# Altium PCB stlink.PcbDoc
Units mm, origin at the board's own origin, x right, y up, seen from the top; angles counter-clockwise.
Board outline 31 x 15 mm, 2 copper layers (Top Layer, Bottom Layer), stack 1.571 mm thick; 18 components, 12 nets, 89 pads, 0 vias.
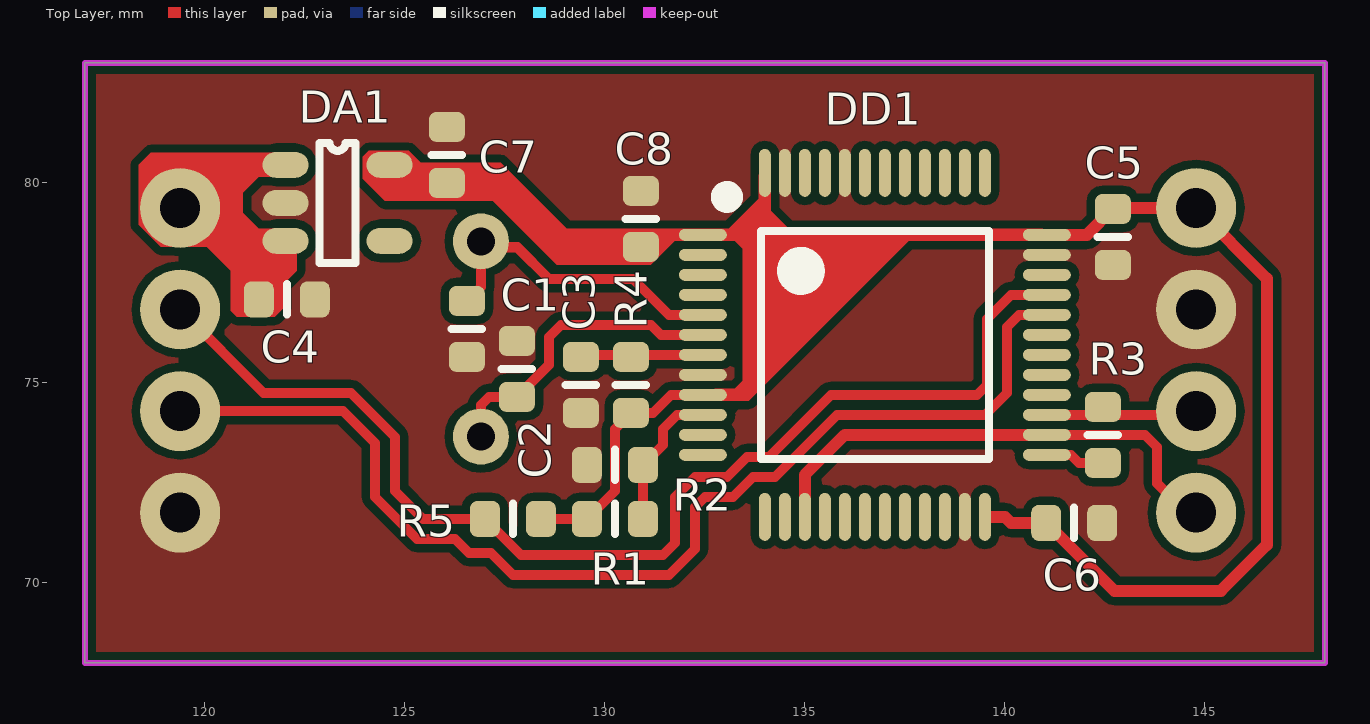
[diagram p0: Top Layer view]
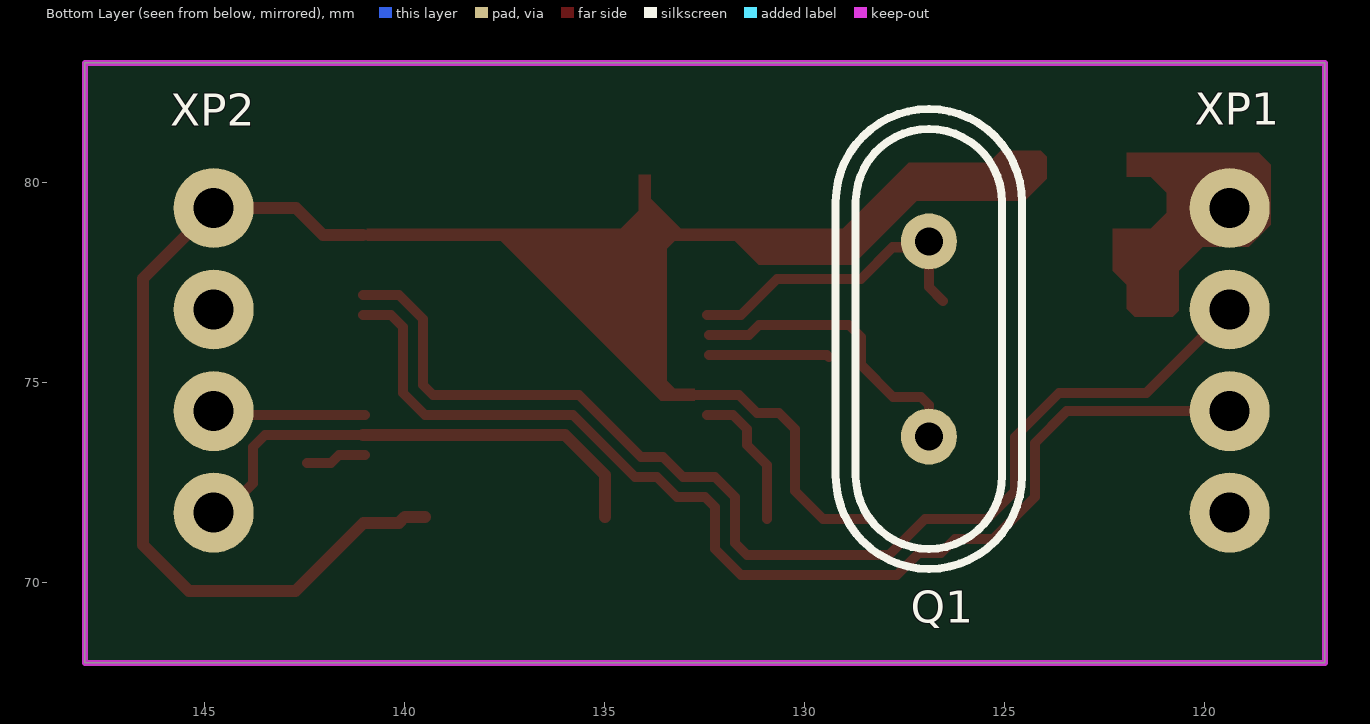
[diagram p1: Bottom Layer view, seen from below]
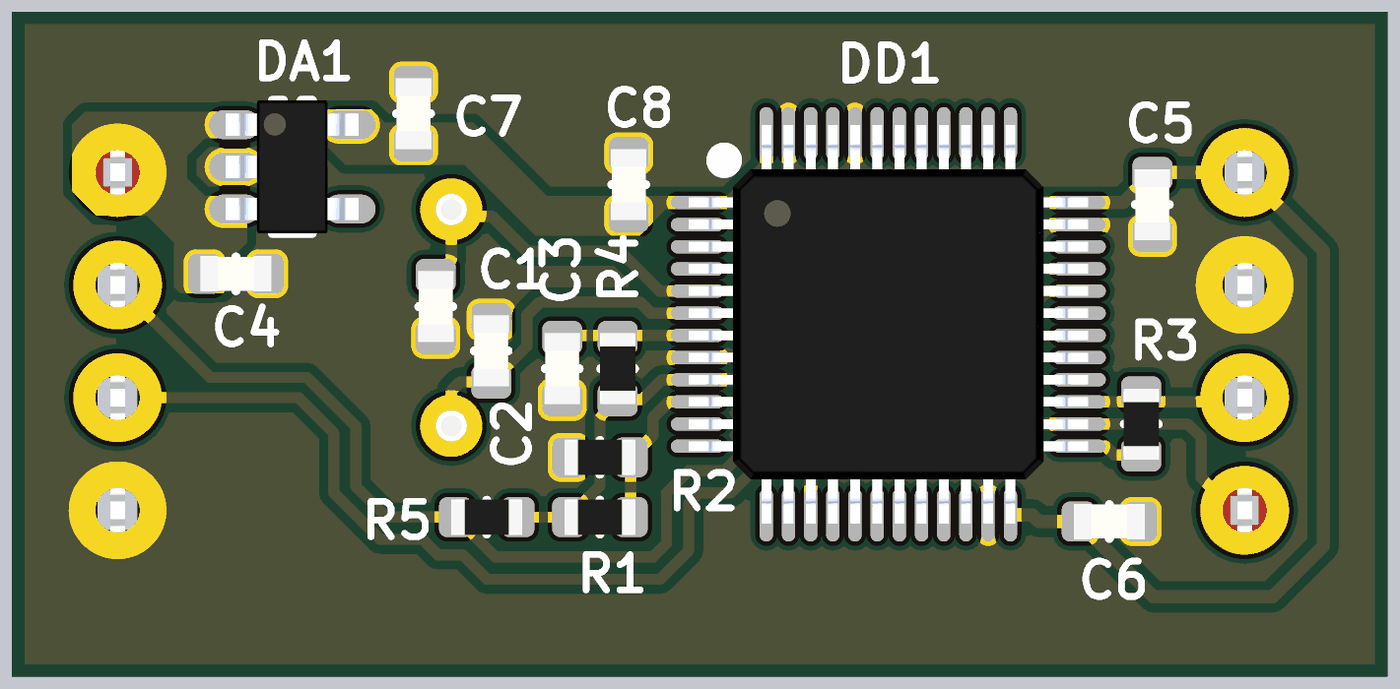
[diagram p2: 3D render of the assembled board from above, using the file's embedded part models]
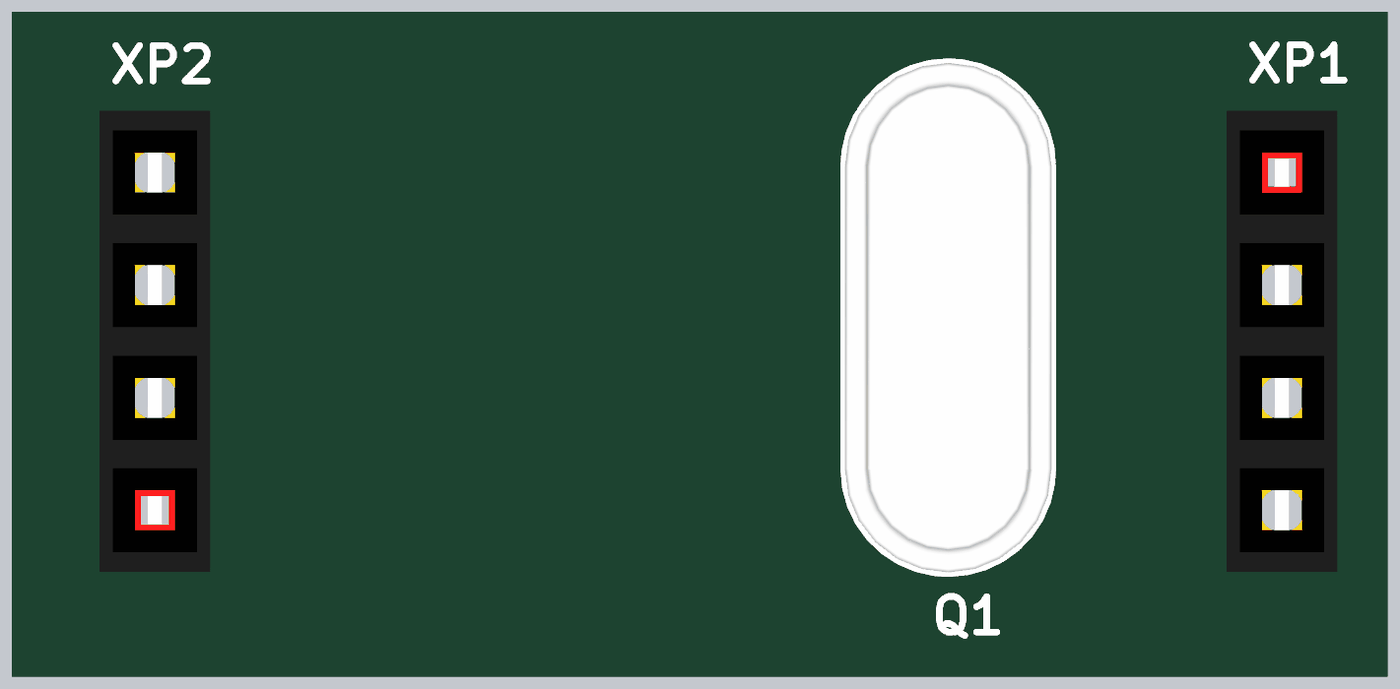
[diagram p3: 3D render of the assembled board from below, using the file's embedded part models]

## Layer stack, top to bottom
Top Solder: solder mask 0.0102, Solder Resist, Dk 3.5
Top Layer: signal copper 0.0356
Dielectric 1: dielectric 1.5, FR-4, Dk 4.8
Bottom Layer: signal copper 0.0356
Bottom Solder: solder mask 0.0102, Solder Resist, Dk 3.5

## Board outline
117,68 117,83 148,83 148,68

## Design rules (kind name [scope] priority, off if disabled: settings)
Clearance [All] p1: gap=0.2
PolygonConnect [All] p1: connectstyle=Direct reliefconductorwidth=0.254 reliefentries=4 polygonreliefangle="90 Angle" airgapwidth=0.254
RoutingVias [All] p1: holewidth=0.711 width=1.27 viastyle="Through Hole" minholewidth=0.711 minwidth=1.27 maxholewidth=0.711 maxwidth=1.27
SolderMaskExpansion [All] p1: expansion=0.102
Width [All] p1: maxlimit=2 minlimit=0.2 preferedwidth=0.25
29 further rules are at their usual default settings.

## Components (designator, comment, footprint, x,y, rotation, side; value= is the part's Value field where it differs from the comment)
C1 "22pF" CAP0603R 126.55,76.35 r90 top
C2 "22pF" CAP0603R 127.8,75.35 r270 top
C3 "100nF" CAP0603R 129.4,74.95 r90 top
C4 "1uF" CAP0603R 122.047,77.089 r180 top
C5 "1uF" CAP0603R 142.7,78.65 r90 top
C6 "1uF" CAP0603R 141.732,71.501 r180 top
C7 "1uF" CAP0603R 126.05,80.7 r270 top
C8 "1uF" CAP0603R 130.9,79.1 r270 top
DA1 "LDS3985M30R" SOT23-5 123.317,79.502 r0 top
DD1 "STM32F103CBT6" LQFP48 136.75,75.95 r0 top
Q1 "20MHz" XTAL_HC-49/U 126.9,76.1 r90 bottom
R1 "10k" RES0603R 130.25,71.6 r180 top
R2 "10k" RES0603R 130.25,72.95 r0 top
R3 "220" RES0603R 142.45,73.7 r90 top
R4 "10k" RES0603R 130.65,74.95 r270 top
R5 "10k" RES0603R 127.7,71.6 r0 top
XP1 "PBS" PBS-04 119.38,75.565 r90 bottom
XP2 "PBS" PBS-04 144.78,75.565 r270 bottom

## Footprints (in the part's own frame and the unit in brackets; to place one, negate y for a bottom-side part, rotate by r counter-clockwise, add the part's x,y. Pads: shape width x height; smd on the part's side, far side on the other; paste and mask are expansions set on the pad)
CAP0603R [mm] "capacitor 0603 reflow soldering"
  rrect50% 0.75x0.9 smd: 1(-0.7,0) 2(0.7,0)
  silkscreen extent 0,-0.38 0,0.38, body extent -0.8,-0.4 0.8,0.4, height 0.81
LQFP48 [mm] "Thin QFP, 48-Leads, Body 7x7mm, Pitch 0.5mm, IPC High Density"
  oval 1.2x0.3 smd mask+0.1: 1(-4.3,2.75) 2(-4.3,2.25) 3(-4.3,1.75) 4(-4.3,1.25) 5(-4.3,0.75) 6(-4.3,0.25) 7(-4.3,-0.25) 8(-4.3,-0.75) 9(-4.3,-1.25) 10(-4.3,-1.75) 11(-4.3,-2.25) 12(-4.3,-2.75) 25(4.3,-2.75) 26(4.3,-2.25) 27(4.3,-1.75) 28(4.3,-1.25) 29(4.3,-0.75) 30(4.3,-0.25) 31(4.3,0.25) 32(4.3,0.75) 33(4.3,1.25) 34(4.3,1.75) 35(4.3,2.25) 36(4.3,2.75)
  oval 0.3x1.2 smd mask+0.1: 13(-2.75,-4.3) 14(-2.25,-4.3) 15(-1.75,-4.3) 16(-1.25,-4.3) 17(-0.75,-4.3) 18(-0.25,-4.3) 19(0.25,-4.3) 20(0.75,-4.3) 21(1.25,-4.3) 22(1.75,-4.3) 23(2.25,-4.3) 24(2.75,-4.3) 37(2.75,4.3) 38(2.25,4.3) 39(1.75,4.3) 40(1.25,4.3) 41(0.75,4.3) 42(0.25,4.3) 43(-0.25,4.3) 44(-0.75,4.3) 45(-1.25,4.3) 46(-1.75,4.3) 47(-2.25,4.3) 48(-2.75,4.3)
  silkscreen extent -3.9,-2.85 2.85,3.9, body extent -4.5,-4.5 4.5,4.5, height 1.52
PBS-04 [mm]
  round 2 hole 1: 1(-3.81,0) 2(-1.27,0) 3(1.27,0) 4(3.81,0)
  body extent -5.21,-1.25 5.2,1.25, height 8.51
RES0603R [mm] "resistor 0603 reflow soldering"
  rrect50% 0.75x0.9 smd: 1(-0.7,0) 2(0.7,0)
  silkscreen extent 0,-0.38 0,0.38, body extent -0.8,-0.4 0.8,0.4, height 0.46
SOT23-5 [mm] "SOT23, 5-Leads, Body 2.9x1.6mm, Pitch 0.95mm, Lead Span 2.8mm, IPC High Density"
  oval 1.15x0.65 smd mask+0.1: 1(-1.3,0.95) 2(-1.3,0) 3(-1.3,-0.95) 4(1.3,-0.95) 5(1.3,0.95)
  silkscreen extent -0.45,-1.5 0.45,1.5, body extent -1.5,-1.5 1.5,1.5, height 1.3
XTAL_HC-49/U [mm] "HC-49/U Leaded Cristal, Body 11.05x4.8mm; Pitch 4.88mm"
  round 1.4 hole 0.7: 1(-2.44,0) 2(2.44,0)
  silkscreen extent -5.75,-2.33 5.75,2.33, body extent -5.75,-2.33 5.75,2.33, height 3.5

## Part data
C1 C2: library part CC0603_22PF_50V_5%_NP0, "SMD 0805 Capacitor"
C3: library part CC0603_100NF_100V_10%_X7R, "SMD 0805 Capacitor"
C4 C5 C6 C7 C8: library part CC0603_1UF_25V_10%_X7R, "SMD 0805 Capacitor"
Q1: library part XTAL_20MHZ_AEL_HC-49/U, "Quartz Crystal"
R1 R2 R4 R5: library part R0603_10K_0.1%_0.063W_10PPM
R3: library part R0603_220R_1%_0.1W_100PPM
XP1 XP2: library part PBS-04

## Nets (pads, with @x,y where several pads share a name; then routed paths per layer and width w, separated by ;. In a path a pad name is that pad's centre, name@x,y a point inside that pad or via, vN(x,y) a via of type N, cw(c..) or ccw(c..) an arc to the next point about the centre after c; other vN are vias at no path point)
GND: C1.1 C2.1 C3.1 C4.1 C5.1 C6.1 C7.1 C8.1 DA1.2 DD1.8 DD1.23 DD1.35 DD1.44 DD1.47 R2.1 XP1.1 XP2.2
J_SWCK: DD1.15 DD1.26 XP2.4 | length 12.2
  Top Layer w0.25: DD1.26 143.5,73.7 143.8,73.4 143.8,72.49 XP2.4@144.45,71.84
  Top Layer w0.3: DD1.15 135,72.7 136,73.7 DD1.26
J_SWIO: DD1.27 R3.2 XP2.3 | length 3.3
  Top Layer w0.254: DD1.27@141,74.2 XP2.3@144.27,74.2
NetC1_2: C1.2 DD1.5 Q1.2 | length 7.7
  Top Layer w0.254: C1.2 126.9,77.4 126.9,78.39 127.81,78.39 128.6,77.6 130.7,77.6 131.6,76.7 DD1.5
NetC2_2: C2.2 DD1.6 Q1.1 | length 7.8
  Top Layer w0.254: Q1.1@126.9,73.51 126.9,74.45 127.1,74.65 C2.2 128.6,75.45 128.6,76.15 128.9,76.45 131.15,76.45 131.4,76.2 DD1.6@132.4,76.2
NetDD1_25: DD1.25 R3.1 | length 1.5
  Top Layer w0.254: DD1.25@141,73.2 141.65,73.2 141.85,73 R3.1
NRST: C3.2 DD1.7 R4.1 | length 3
  Top Layer w0.254: C3.2 129.45,75.7 DD1.7@132.4,75.7
SENSE: DD1.10 R1.1 R2.2 | length 3.6
  Top Layer w0.254: R1.1 R2.2 131.45,73.45 131.45,73.85 131.8,74.2 DD1.10
USBDM: DD1.32 XP1.2 | length 28.4
  Top Layer w0.25: XP1.2 123.455,74.295 124.25,73.5 124.25,72.15 125.3,71.1 126.25,71.1 126.6,70.75 127.15,70.75 127.7,70.2 131.6,70.2 132.25,70.85 132.25,71.9 132.5,72.15 133.2,72.15 133.7,72.65 134.25,72.65 135.8,74.2 139.5,74.2 140.05,74.75 140.05,76.4 140.35,76.7 DD1.32
USBDP: DD1.33 R5.1 XP1.3 | length 29.8
  Top Layer w0.254: XP1.3@119.253,77.343 XP1.3@119.57,77.026 ; XP1.3 121.465,74.75 123.65,74.75 124.75,73.65 124.75,72.3 125.45,71.6 R5.1 127.9,70.7 131.45,70.7 131.75,71 131.75,72.15 132.25,72.65 133.05,72.65 133.55,73.15 134.1,73.15 135.65,74.7 139.3,74.7 139.55,74.95 139.55,76.6 140.15,77.2 DD1.33
VCC: C4.2 DA1.1 DA1.3 XP1.4
VDD: C5.2 C6.2 C7.2 C8.2 DA1.5 DD1.1 DD1.9 DD1.24 DD1.36 DD1.48 R1.2 R4.2 R5.2 XP2.1 | length 28.4
  Top Layer w0.25: R5.2 R1.2 130.25,72.3 130.25,73.85 R4.2 131.2,74.25 131.65,74.7 133.15,74.7
  Top Layer w0.3: DD1.24 140,71.65 140.149,71.501 C6.2 142.733,69.8 145.4,69.8 146.55,70.95 146.55,77.605 XP2.1 C5.2@142.725,79.375 ; DD1.36 142.05,78.7 C5.2
pads on no net: DA1.4 DD1.2 DD1.3 DD1.4 DD1.11 DD1.12 DD1.13 DD1.14 DD1.16 DD1.17 DD1.18 DD1.19 DD1.20 DD1.21 DD1.22 DD1.28 DD1.29 DD1.30 DD1.31 DD1.34 DD1.37 DD1.38 DD1.39 DD1.40 DD1.41 DD1.42 DD1.43 DD1.45 DD1.46

## Polygon pours and split planes (outlines as drawn)
GND on Top Layer "Top Layer-No Net" (solid, remove dead copper, pour order 2): 117.05,83 148,83 148,68 117.05,68

## Keep-outs
Keep-Out Layer:
  the board outline again, w0.15

## Other copper
Top Layer:
  region net VDD: 133.85,80.2 133.85,79.6 133.1,78.85 129.05,78.85 127.4,80.5 125.4,80.5 125.1,80.8 124.1,80.8 123.95,80.65 123.95,80.1 124.5,79.55 127.2,79.55 128.8,77.95 131.15,77.95 131.75,78.55 133.25,78.55 133.45,78.35 133.45,75.05 133.25,74.85 132.75,74.85 132.75,74.55 133.6,74.55 137.6,78.55 140.95,78.55 140.95,78.85 134.6,78.85 134.15,79.3 134.15,80.2
  region net VCC: 121.95,80.75 118.65,80.75 118.35,80.45 118.35,78.95 118.9,78.4 120.05,78.4 120.65,77.8 120.65,76.8 120.8,76.65 121.75,76.65 121.95,76.85 121.95,77.45 122.3,77.8 122.3,78.85 121.35,78.85 120.95,79.25 120.95,79.75 121.35,80.15 121.95,80.15